# EAGLE board ATESLEME (EAGLE 9.6.2)
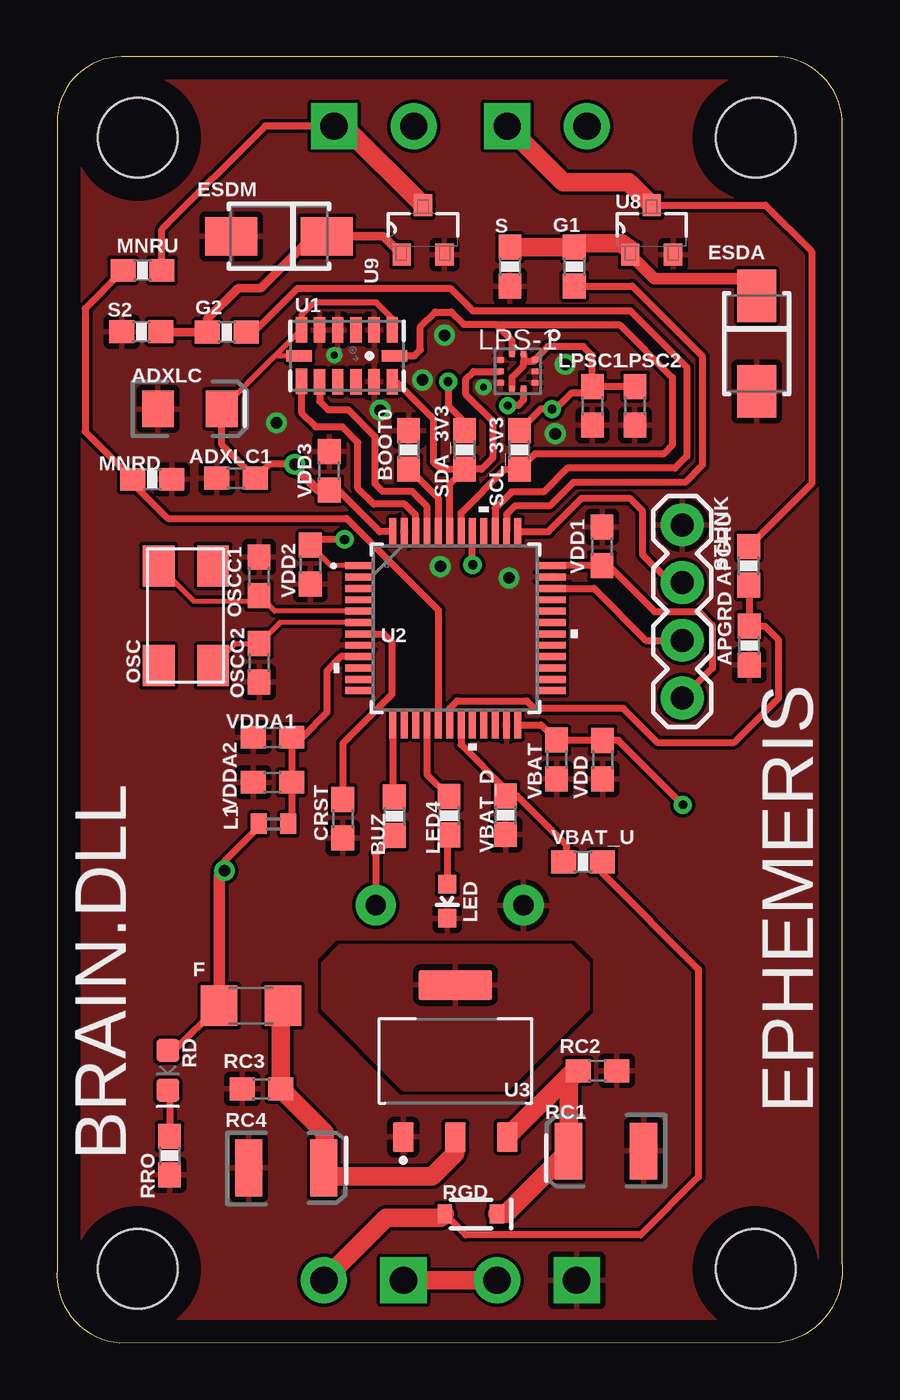
[diagram p0: board, top side]
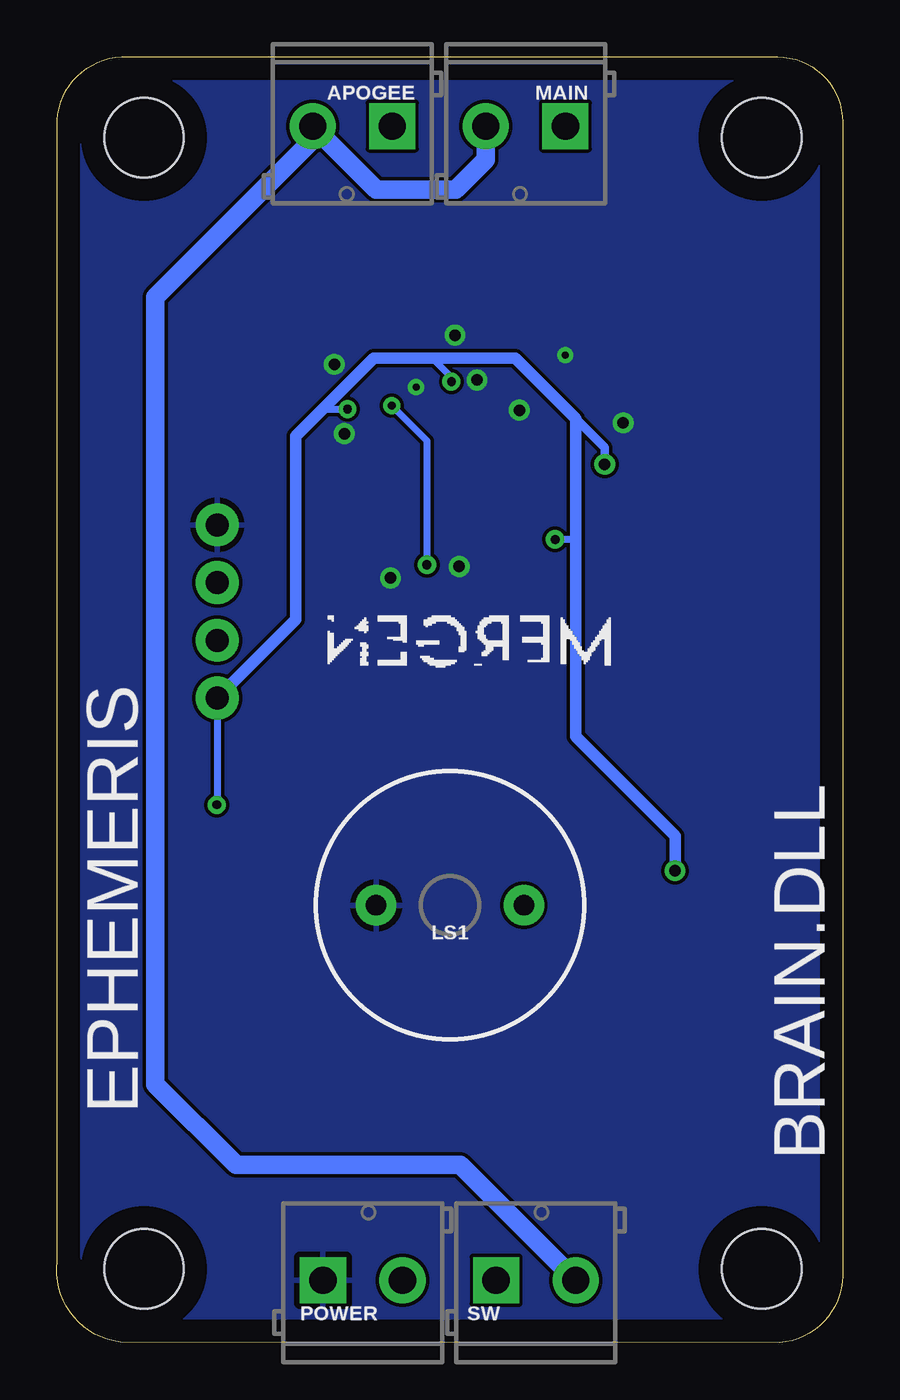
[diagram p1: board, bottom side, seen from below]

Size 34.58 x 56.59 mm. Coordinates in mm from the lower left corner, seen from the top.
Outline: 0.01,53.72 0.01,3.23 arc90 2.78,0 31.78,0.03 arc90 34.55,3.58 34.55,53.8 arc90 31.45,56.59 2.85,56.59 arc90 0.01,53.72
Copper layers (1*16): Top 0.035mm / dielectric 1.5mm / Bottom 0.035mm
Design rules "default": minimum track width 6mil, minimum drill 0.35mm, track to track 6mil, track to pad 6mil, pad to pad 6mil, via to via 6mil, smd to smd 6mil, copper to edge 40mil, drill to drill 6mil, minimum pad ring 10mil, minimum via ring 8mil, stop-mask expansion 4mil, vias tented up to drill 0mil, thermal gap 10mil
Holes 3.5 mm at 30.74,3.25 3.56,3.25 3.56,53.04 30.74,53.04

## Footprints (pad centres in the part's own frame; a part is rotated, then mirrored left to right if it is on the bottom)
EIA3216 = smd 1.4 x 1.6: + 1.4,0; - -1.4,0
0603 = smd 1.1 x 1: 1 -0.85,0; 2 0.85,0
0603-RES = smd 1.1 x 1: 1 -0.85,0; 2 0.85,0
SCREWTERMINAL-3.5MM-2-NS = drill 1.2 pad 2.032 square: 1 0,0 | drill 1.2 pad 2.032: 2 3.5,0
WE-TVSP_DO-214AC_UNIDIRECTIONAL = smd 2.3 x 1.7: 1 -2.1,0; 2 2.1,0
1206 = smd 1.6 x 1.8: 1 -1.4,0; 2 1.4,0
0402 = smd 0.7 x 0.9: 1 -0.65,0; 2 0.65,0
LED-0603 = smd 0.8 x 0.8: A 0,-0.75; C 0,0.75
LPS22H = smd 0.25 x 0.275: 1 -0.25,-0.762; 2 0.25,-0.762; 6 0.25,0.762; 7 -0.25,0.762 | smd 0.275 x 0.25: 3 0.762,-0.5; 4 0.762,0; 5 0.762,0.5; 8 -0.762,0.5; 9 -0.762,0; 10 -0.762,-0.5
BUZZER-12MM = drill 0.9 pad 1.778: + 3.25,0; - -3.25,0
ABMM2-8.000MHZ-E2-T = smd 1.803 x 1.397: GND@0 -2.159,1.118; GND@1 2.235,-1.27; OUT -2.159,-1.27; ıN 2.235,1.118
EIA3528 = smd 1.2 x 2.5: A 1.65,0; C -1.65,0
LED-0603' = smd 1 x 1: A -0.877,0; C 0.877,0
SOD-323 = smd 0.63 x 0.83: A 1.15,0; C -1.15,0
1X04 = drill 1.016 pad 1.88: 1 0,0; 2 2.54,0; 3 5.08,0; 4 7.62,0
LGA14_1:1_PATRICK = smd 0.5 x 1.124: 1 2,1.138; 2 1.2,1.138; 3 0.4,1.138; 4 -0.4,1.138; 5 -1.2,1.138; 6 -2,1.138; 8 -2,-1.13; 9 -1.2,-1.138; 10 -0.4,-1.138; 11 0.4,-1.138; 12 1.2,-1.138; 13 2,-1.138 | smd 1.124 x 0.5: 7 -2.1,0; 14 2.1,0
LQFP48-7X7MM = smd 1.194 x 0.305: 1 -4.25,2.75; 2 -4.25,2.25; 3 -4.25,1.75; 4 -4.25,1.25; 5 -4.25,0.75; 6 -4.25,0.25; 7 -4.25,-0.25; 8 -4.25,-0.75; 9 -4.25,-1.25; 10 -4.25,-1.75; 11 -4.25,-2.25; 12 -4.25,-2.75; 25 4.25,-2.75; 26 4.25,-2.25; 27 4.25,-1.75; 28 4.25,-1.25; 29 4.25,-0.75; 30 4.25,-0.25; 31 4.25,0.25; 32 4.25,0.75; 33 4.25,1.25; 34 4.25,1.75; 35 4.25,2.25; 36 4.25,2.75 | smd 0.305 x 1.194: 13 -2.75,-4.25; 14 -2.25,-4.25; 15 -1.75,-4.25; 16 -1.25,-4.25; 17 -0.75,-4.25; 18 -0.25,-4.25; 19 0.25,-4.25; 20 0.75,-4.25; 21 1.25,-4.25; 22 1.75,-4.25; 23 2.25,-4.25; 24 2.75,-4.25; 37 2.75,4.25; 38 2.25,4.25; 39 1.75,4.25; 40 1.25,4.25; 41 0.75,4.25; 42 0.25,4.25; 43 -0.25,4.25; 44 -0.75,4.25; 45 -1.25,4.25; 46 -1.75,4.25; 47 -2.25,4.25; 48 -2.75,4.25
SOT229P700X180-4N = smd 0.93 x 1.31: 1 -2.29,-3.345; 2 0,-3.345; 3 2.29,-3.345 | smd 3.24 x 1.31: 4 0,3.345
SOT95P240X112-3N = smd 0.972 x 0.802: D 1.092,0; G -1.092,0.94; S -1.092,-0.94

## Placement (x,y rotation side)
ADXLC  0.1uF  [EIA3216]  5.85,41.1 0 top
ADXLC1  10uF  [0603]  7.88,38.05 180 top
APGRD  3.3k  [0603-RES]  30.46,30.68 90 top
APGRU  10k  [0603-RES]  30.44,34.19 90 top
APOGEE  [SCREWTERMINAL-3.5MM-2-NS]  19.82,53.54 180 bottom
BOOT0  10k  [0603-RES]  15.48,39.3 270 top
BUZ  22R  [0603-RES]  14.84,23.16 270 top
CRST  100nF  [0603]  12.58,23.06 270 top
ESDA  12V  [WE-TVSP_DO-214AC_UNIDIRECTIONAL]  30.79,43.97 270 top
ESDM  12V  [WE-TVSP_DO-214AC_UNIDIRECTIONAL]  9.77,48.69 180 top
F  0.75A  [1206]  8.54,14.83 180 top
G1  20  [0603-RES]  22.76,47.36 270 top
G2  20  [0603-RES]  7.48,44.48 0 top
L1  BLM15HB221SN1  [0402]  9.53,22.83 0 top
LED  GREEN  [LED-0603]  17.18,19.43 180 top
LED4  1k  [0603-RES]  17.25,23.19 270 top
LPS-1  LPS22  [LPS22H]  20.28,42.75 180 top
LPSC1  4.7uF  [0603]  23.56,41.23 270 top
LPSC2  100nF  [0603]  25.44,41.23 270 top
LS1  BUZZER-PTH  [BUZZER-12MM]  17.28,19.25 0 bottom
MAIN  [SCREWTERMINAL-3.5MM-2-NS]  12.2,53.54 180 bottom
MNRD  3.3k  [0603-RES]  4.2,38 180 top
MNRU  10k  [0603-RES]  3.77,47.19 0 top
OSC  [ABMM2-8.000MHZ-E2-T]  5.6,31.95 90 top
OSCC1  25pF  [0603]  8.9,33.73 90 top
OSCC2  25pF  [0603]  8.9,29.92 270 top
POWER  [SCREWTERMINAL-3.5MM-2-NS]  22.87,2.74 0 bottom
RC1  22uF  [EIA3528]  24.16,8.43 180 top
RC2  100nF  [0603]  23.78,11.96 0 top
RC3  100nF  [0603]  9,11.18 180 top
RC4  22uF  [EIA3528]  10.09,7.7 0 top
RD  Red  [LED-0603']  4.89,11.99 270 top
RGD  1A/23V  [SOD-323]  18.22,5.66 180 top
RRO  1.5k  [0603-RES]  4.96,8.23 270 top
S  3.3k  [0603-RES]  19.93,47.36 270 top
S2  3.3k  [0603-RES]  3.72,44.5 180 top
SCL_3V3  4.7k  [0603-RES]  20.35,39.29 90 top
SDA_3V3  4.7k  [0603-RES]  17.94,39.29 90 top
STLINK  [1X04]  27.52,35.99 270 top
SW  [SCREWTERMINAL-3.5MM-2-NS]  15.25,2.74 0 bottom
U1  ADXL345PATRICK  [LGA14_1:1_PATRICK]  12.76,43.43 0 top
U2  [LQFP48-7X7MM]  17.53,31.45 0 top
U3  AMS1117-3.3  [SOT229P700X180-4N]  17.53,12.4 0 top
U8  [SOT95P240X112-3N]  26.17,48.97 90 top
U9  [SOT95P240X112-3N]  16.11,48.97 90 top
VBAT  100nF  [0603]  21.99,25.67 270 top
VBAT_D  3.3k  [0603-RES]  19.74,23.22 90 top
VBAT_U  10k  [0603-RES]  23.15,21.16 0 top
VDD  4.7uF  [0603]  24.01,25.66 270 top
VDD1  100nF  [0603]  23.99,35.04 90 top
VDD2  100nF  [0603]  11.15,34.24 270 top
VDD3  100nF  [0603]  11.98,38.37 90 top
VDDA1  1uF  [0603]  9.48,26.64 180 top
VDDA2  100nF  [0603]  9.48,24.66 180 top

## Library data of the parts
ADXLC = SparkFun-Capacitors; PROD_ID: CAP-00811
ADXLC1 CRST LPSC1 LPSC2 OSCC1 OSCC2 RC2 RC3 VBAT VDD VDD1-VDD3 VDDA1 VDDA2 = SparkFun-Capacitors; PROD_ID: CAP-00810
APGRD APGRU BOOT0 BUZ G1 G2 LED4 MNRD MNRU RRO S S2 SCL_3V3 SDA_3V3 VBAT_D VBAT_U = SparkFun-Resistors; PROD_ID: RES-08296
APOGEE MAIN POWER SW = SparkFun-Connectors; PROD_ID: CONN-08399
ESDA ESDM = Wurth_EMC Components_WE-TVSP; DATASHEET-URL: https://www.we-online.com/catalog/datasheet/824500102.pdf; IPEAK: 2.5A; MOUNT: SMT; PART-NUMBER: 824500102; PDISS: 400W; VBR: 117V; VCLAMP: 162V
F = SparkFun-Fuses; PROD_ID: RES-11150
L1 = inductors
LED = SparkFun-LED; PROD_ID: DIO-00819
LPS-1 = Arduino-Sensors; CODE-ARDUINO: A5390; DATASHEET: https://www.st.com/content/ccc/resource/technical/document/datasheet/bf/c1/4f/23/61/17/44/8a/DM00140895.pdf/files/DM00140895.pdf/jcr:content/translations/en.DM00140895.pdf; DISTRIBUTOR-LINK: https://www.digikey.com/product-detail/en/stmicroelectronics/LPS22HBTR/497-16265-1-ND/5799917; DISTRIBUTOR-PN: 497-16265-1-ND; MANUFACTURER: ST; MANUFACTURER-PN: LPS22HBTR
LS1 = SparkFun-Electromechanical; PROD_ID: COMP-08253; SF_SKU: COM-07950
OSC = ABMM2-8.000MHZ-E2-T
RC1 RC4 = SparkFun-Capacitors; PROD_ID: CAP-08063
RD = SparkFun-LED; PROD_ID: DIO-11154
RGD = SparkFun-DiscreteSemi; PROD_ID: DIO-11623
STLINK = SparkFun-Connectors; PROD_ID: CONN-09696
U1 = Testing
U2 = STM32F103C8T6; BUILT_BY: EMA_UL_Team; COPYRIGHT: Copyright (C) 2018 Accelerated Designs. All rights reserved; MANUFACTURER_PART_NUMBER: STM32F103C8T6; SOURCELIBRARY: Updates_to_database_2020-10-19; VENDOR: STMicroelectronics
U3 = AMS1117-3.3; AVAILABILITY: Unavailable; DESCRIPTION: Sot223/Pkg 1-Amp 3.3-Volt Low Drop Out Voltage Regulatator; MF: Advanced Monolithic Systems; MP: AMS1117-3.3; PACKAGE: SOT-89 ams; PRICE: None
U8 U9 = IRLML6344TRPBF; AVAILABILITY: Good; DESCRIPTION: N-Channel 30V 5A (Ta) 1.3W (Ta) Surface Mount Micro3™/SOT-23; MF: Infineon Technologies; MP: IRLML6344TRPBF; PACKAGE: SOT-23 Multicomp; PRICE: None; PURCHASE-URL: https://pricing.snapeda.com/search/part/IRLML6344TRPBF/?ref=eda

## Nets
3.3V: ADXLC1.1 ADXLC.+ F.2 L1.1 LPS-1.1 LPS-1.6 LPS-1.10 LPSC1.1 LPSC2.1 RD.A SCL_3V3.2 SDA_3V3.2 STLINK.4 U1.1 U1.6 U1.7 U2.1 U2.24 U2.36 U2.48 VBAT.1 VDD1.1 VDD2.1 VDD3.1 VDD.1
APG: G1.2 U2.38
BOOT0: BOOT0.2 U2.44
BUZZER: BUZ.1 U2.13
GND: ADXLC1.2 ADXLC.- APGRD.1 BOOT0.1 CRST.2 ESDA.2 ESDM.2 LED.C LPS-1.3 LPS-1.5 LPS-1.8 LPS-1.9 LPSC1.2 LPSC2.2 LS1.- MNRD.1 OSCC1.2 OSCC2.2 POWER.1 RC1.C RC2.2 RC3.2 RC4.C RRO.2 S2.2 S.2 STLINK.1 U1.2 U1.4 U1.5 U1.12 U2.8 U2.23 U2.35 U2.47 U3.1 U8.S U9.S VBAT.2 VBAT_D.1 VDD1.2 VDD2.2 VDD3.2 VDD.2 VDDA1.2 VDDA2.2
HT: U3.4
IN1: U1.8 U2.46
IN2: U1.9 U2.45
INT1: LPS-1.7 U2.41
LED: LED4.1 U2.16
MN: G2.2 U2.39
N$1: F.1 RC3.1 RC4.A U3.2
N$2: RD.C RRO.1
N$8: ESDM.1 G2.1 S2.1 U9.G
N$10: LED4.2 LED.A
N$13: BUZ.2 LS1.+
N$14: ESDA.1 G1.1 S.1 U8.G
NRST: CRST.1 U2.7
OSC_OUT: OSC.OUT OSCC2.1 U2.6
OSC_ıN: OSC.ıN OSCC1.1 U2.5
PC13: U2.2
SCL_3V3: LPS-1.2 SCL_3V3.1 U1.14 U2.42
SDA_3V3: LPS-1.4 SDA_3V3.1 U1.13 U2.43
SWCLK: STLINK.2 U2.37
SWDIO: STLINK.3 U2.34
VAPG: APGRU.2 APOGEE.1 U8.D
VAPGS: APGRD.2 APGRU.1 U2.18
VCC: POWER.2 SW.1
VDDA: L1.2 U2.9 VDDA1.1 VDDA2.1
VIN: APOGEE.2 MAIN.2 RGD.A SW.2 VBAT_U.2
VMN: MAIN.1 MNRU.2 U9.D
VMNS: MNRD.2 MNRU.1 U2.17
VNR: RC1.A RC2.1 RGD.C U3.3
VSENS: U2.19 VBAT_D.2 VBAT_U.1

## Tracks (layer width: path | path; a pad name or v marks a point on that pad's centre or on a via)
3.3V  (via drill 0.38, 0.41, 0.51)
  Top 0.152: 20.99,43.2 LPS-1.10 21.04,43.29 | LPS-1.1 20.54,43.5
  Top 0.229: U2.1 12.05,34.2 VDD2.1 | U1.7 9.59,43.43 ADXLC.+ 10.73,44.57 U1.6
  Top 0.254: U1.1 14.76,45.08 14.06,45.78 11.3,45.78 10.76,45.23 U1.6
  Top 0.305: F.2 5.18,12.87 RD.A | U2.48 14.2,35.7 12.37,37.52 VDD3.1 | 20.54,43.2 20.99,43.2 | v17.21,42.3 17.21,41.24 17.94,40.51 SDA_3V3.2 | SCL_3V3.2 21.3,41.09 v21.79,41.09 21.86,41.01 22.63,41.78 23.26,41.78 LPSC1.1 | LPSC2.1 LPSC1.1 | U2.36 VDD1.1 24.28,34.19 26.3,32.17 28.24,32.17 28.84,31.57 28.84,29.69 STLINK.4 | U2.24 21.31,27.2 VBAT.1 VDD.1 24.7,26.51 v27.54,23.67 | v10.47,38.66 9.34,38.66 ADXLC1.1 7.25,39.53 ADXLC.+ | 21.04,43.29 21.59,43.85 23.17,43.85 23.56,43.45 LPSC1.1 | LPS-1.6 20.03,42.5 20.54,43.01 20.54,43.2 | 20.54,43.5 20.54,43.2 | v7.37,20.78 7.37,21.18 8.88,22.69 | v12.65,35.35 11.4,35.35 VDD2.1
  Top 0.381: VDD3.1 11.48,37.52 10.47,38.53 v10.47,38.66
  Top 0.508: v7.37,20.78 7.14,20.55 F.2 | 8.88,22.69 L1.1
  Bottom 0.305: 22.87,41.1 22,41.1 21.99,41.09 v21.79,41.09 | v27.54,23.67 27.52,23.7 STLINK.4 | 11.74,35.35 v12.65,35.35 | v17.21,42.3 17.21,42.49 18.06,43.33 18.86,43.33
  Bottom 0.381: v10.47,38.66 10.47,39.4 11.74,40.67
  Bottom 0.508: v7.37,20.78 7.37,22.3 11.74,26.67 11.74,35.35 11.74,40.67 14.41,43.33 18.86,43.33 20.63,43.33 22.87,41.1 24.06,39.9 24.06,31.83 STLINK.4
APG
  Top 0.305: U2.38 19.78,36.46 20.15,36.83 21.69,36.83 22.72,37.86 27.64,37.86 28.41,38.63 28.41,43.41 25.31,46.51 G1.2
BOOT0
  Top 0.305: BOOT0.2 15.49,38.45 16.78,37.16 U2.44
BUZZER
  Top 0.305: U2.13 14.78,24.07 BUZ.1
GND  (via drill 0.3, 0.51)
  other vias: 18.77,42.06 21.93,40 22.37,43.06 16.09,42.37 14.23,41.04 17.06,44.34 16.87,34.16 19.9,33.65 12.2,43.46 9.66,40.49
  pour Top (rank 2): -2.79,59.39 -2.79,-3.35 38.11,-3.35 38.11,59.39
  pour Bottom (rank 2): -4.06,60.91 -4.06,-5.13 39.63,-5.13 39.63,60.91
HT
  pour Top: 15.25,11.13 19.82,11.13 23.38,14.68 23.38,16.71 22.61,17.48 12.45,17.48 11.69,16.71 11.69,14.68
IN1
  Top 0.152: U2.46
  Top 0.305: U1.8 10.76,40.94 11.39,40.31 12.56,40.31 13.25,39.62 13.25,37.6 13.95,36.9 15.31,36.9 15.78,36.43 U2.46
IN2
  Top 0.305: U1.9 11.56,41.43 11.93,41.06 12.82,41.06 13.99,39.88 13.99,37.81 14.32,37.48 15.62,37.48 16.28,36.82 U2.45
INT1  (via drill 0.35, 0.41)
  Top 0.152: LPS-1.7 | v19.84,41.24 19.85,41.25 | v18.3,34.24 18.28,34.25
  Top 0.305: LPS-1.7 20.53,41.48 20.3,41.25 19.85,41.25 | 18.28,34.25 U2.41
  Bottom 0.305: v19.84,41.24 18.3,39.7 v18.3,34.24
LED
  Top 0.305: U2.16 16.28,25.01 LED4.1
MN
  Top 0.305: U2.39 19.28,36.72 20.01,37.44 21.42,37.44 22.46,38.49 27.19,38.49 27.72,39.01 27.72,42.93 25.23,45.42 18.29,45.42 17.3,46.41 10.59,46.41 8.66,44.48 G2.2
N$1
  Top 0.813: F.1 9.85,14.74 RC3.1 11.78,9.25 11.78,7.73 RC4.A 12.12,7.32 16.52,7.32 17.53,8.33 U3.2
N$2
  Top 0.305: RD.C 4.96,11.04 RRO.1
N$8
  Top 0.381: S2.1 4.59,44.48 G2.1 6.63,45.06 7.98,46.42 8.98,46.42 11.26,48.69 ESDM.1 14.36,48.69 U9.G
N$10
  Top 0.229: LED4.2 17.18,22.26
  Top 0.305: 17.18,22.26 LED.A
N$13
  Top 0.305: BUZ.2 14.03,21.5 LS1.+
N$14
  Top 0.508: U8.G 26.29,46.82 30.04,46.82 ESDA.1
  Top 0.813: U8.G 25.23,48.1 24.83,48.4 22.96,48.4 G1.1 S.1
NRST
  Top 0.229: U2.7
  Top 0.305: U2.7 14.39,31.19 14.74,30.84 14.74,28.53 12.58,26.37 CRST.1
OSC_OUT
  Top 0.229: OSC.OUT 7.84,30.77 OSCC2.1 9.82,31.7 U2.6
OSC_ıN
  Top 0.229: OSC.ıN 6.04,32.63 8.64,32.63 OSCC1.1 9.58,32.2 U2.5
SCL_3V3
  Top 0.305: U2.42 17.78,36.52 19.71,38.44 SCL_3V3.1 21.03,39.12 26.69,39.12 27.08,39.51 27.08,42.47 24.76,44.8 19.33,44.8 | U1.14 15.73,43.43 15.99,43.7 15.99,44.71 16.65,45.36 17.35,45.36 17.9,44.82 19.32,44.82 19.33,44.8 | LPS-1.2 20.03,44.11 19.33,44.8
SDA_3V3
  Top 0.305: U2.43 17.28,37.79 SDA_3V3.1 | LPS-1.4 18.33,42.74 18,42.41 18,41.74 19.19,40.54 19.19,38.94 18.69,38.44 SDA_3V3.1 | U1.13 14.84,42.22 15.01,42.22 16.57,40.67 16.57,38.76 16.89,38.44 SDA_3V3.1
SWCLK
  Top 0.305: STLINK.2 27,33.45 25.76,34.7 25.76,36.61 25.21,37.17 23.09,37.17 21.62,35.7 U2.37
SWDIO
  Top 0.305: STLINK.3 25.92,30.91 23.63,33.2 U2.34
VAPG
  Top 0.305: U8.D 31.17,50.06 33.21,48.03 33.21,37.81 APGRU.2
  Top 0.813: U8.D 25.15,51.08 22.28,51.08 APOGEE.1
VAPGS
  Top 0.229: U2.18 | APGRU.1 30.46,33.31
  Top 0.305: U2.18 17.28,27.91 17.61,28.25 20.68,28.25 21.01,27.92 24.92,27.92 26.42,26.42 29.8,26.42 31.76,28.37 31.76,30.92 31.15,31.53 APGRD.2 30.46,33.31
VCC
  Top 0.813: SW.1 POWER.2
VDDA
  Top 0.229: U2.9 | 10.79,26.64 VDDA1.1 | L1.2 10.33,22.98
  Top 0.305: U2.9 12.5,30.19 11.88,29.57 11.88,27.74 10.79,26.64 | VDDA1.1 VDDA2.1 10.33,22.98
VIN
  Top 0.305: VBAT_U.2 24,20.66 28.23,16.43 28.23,7.29 25.69,4.75 17.99,4.75 RGD.A
  Top 0.813: SW.2 14.49,5.49 16.89,5.49 RGD.A
  Bottom 0.813: MAIN.2 15.7,52.08 17.03,50.75 20.53,50.75 APOGEE.2 23.32,52.93 30.23,46.02 30.23,11.38 26.68,7.82 16.83,7.82 SW.2
VMN
  Top 0.305: MNRU.2 4.62,49 9.16,53.54 MAIN.1
  Top 0.813: MAIN.1 12.63,53.54 U9.D
VMNS
  Top 0.229: MNRD.2 3.35,37.81
  Top 0.305: MNRD.2 1.24,40.11 1.24,45.52 MNRU.1 | U2.17 16.78,32.24 12.75,36.27 4.89,36.27 3.35,37.81
VNR
  Top 0.813: RGD.C 19.75,5.66 RC1.A 22.51,11.54 RC2.1 22.74,11.96 U3.3
VSENS
  Top 0.305: U2.19 17.78,26.32 19.74,24.36 VBAT_D.2 20.25,24.07 22.41,21.91 22.41,21.27 VBAT_U.1

## Text on the board
tPlace: BRAIN.DLL | EPHEMERIS
bPlace: BRAIN.DLL | EPHEMERIS